# Altium PCB v2.2.0.PcbDoc
Units mm, origin at the board's own origin, x right, y up, seen from the top; angles counter-clockwise.
Board outline 151.5 x 128 mm, 2 copper layers (Top Layer, Bottom Layer); 76 components, 189 nets, 308 pads, 181 vias.
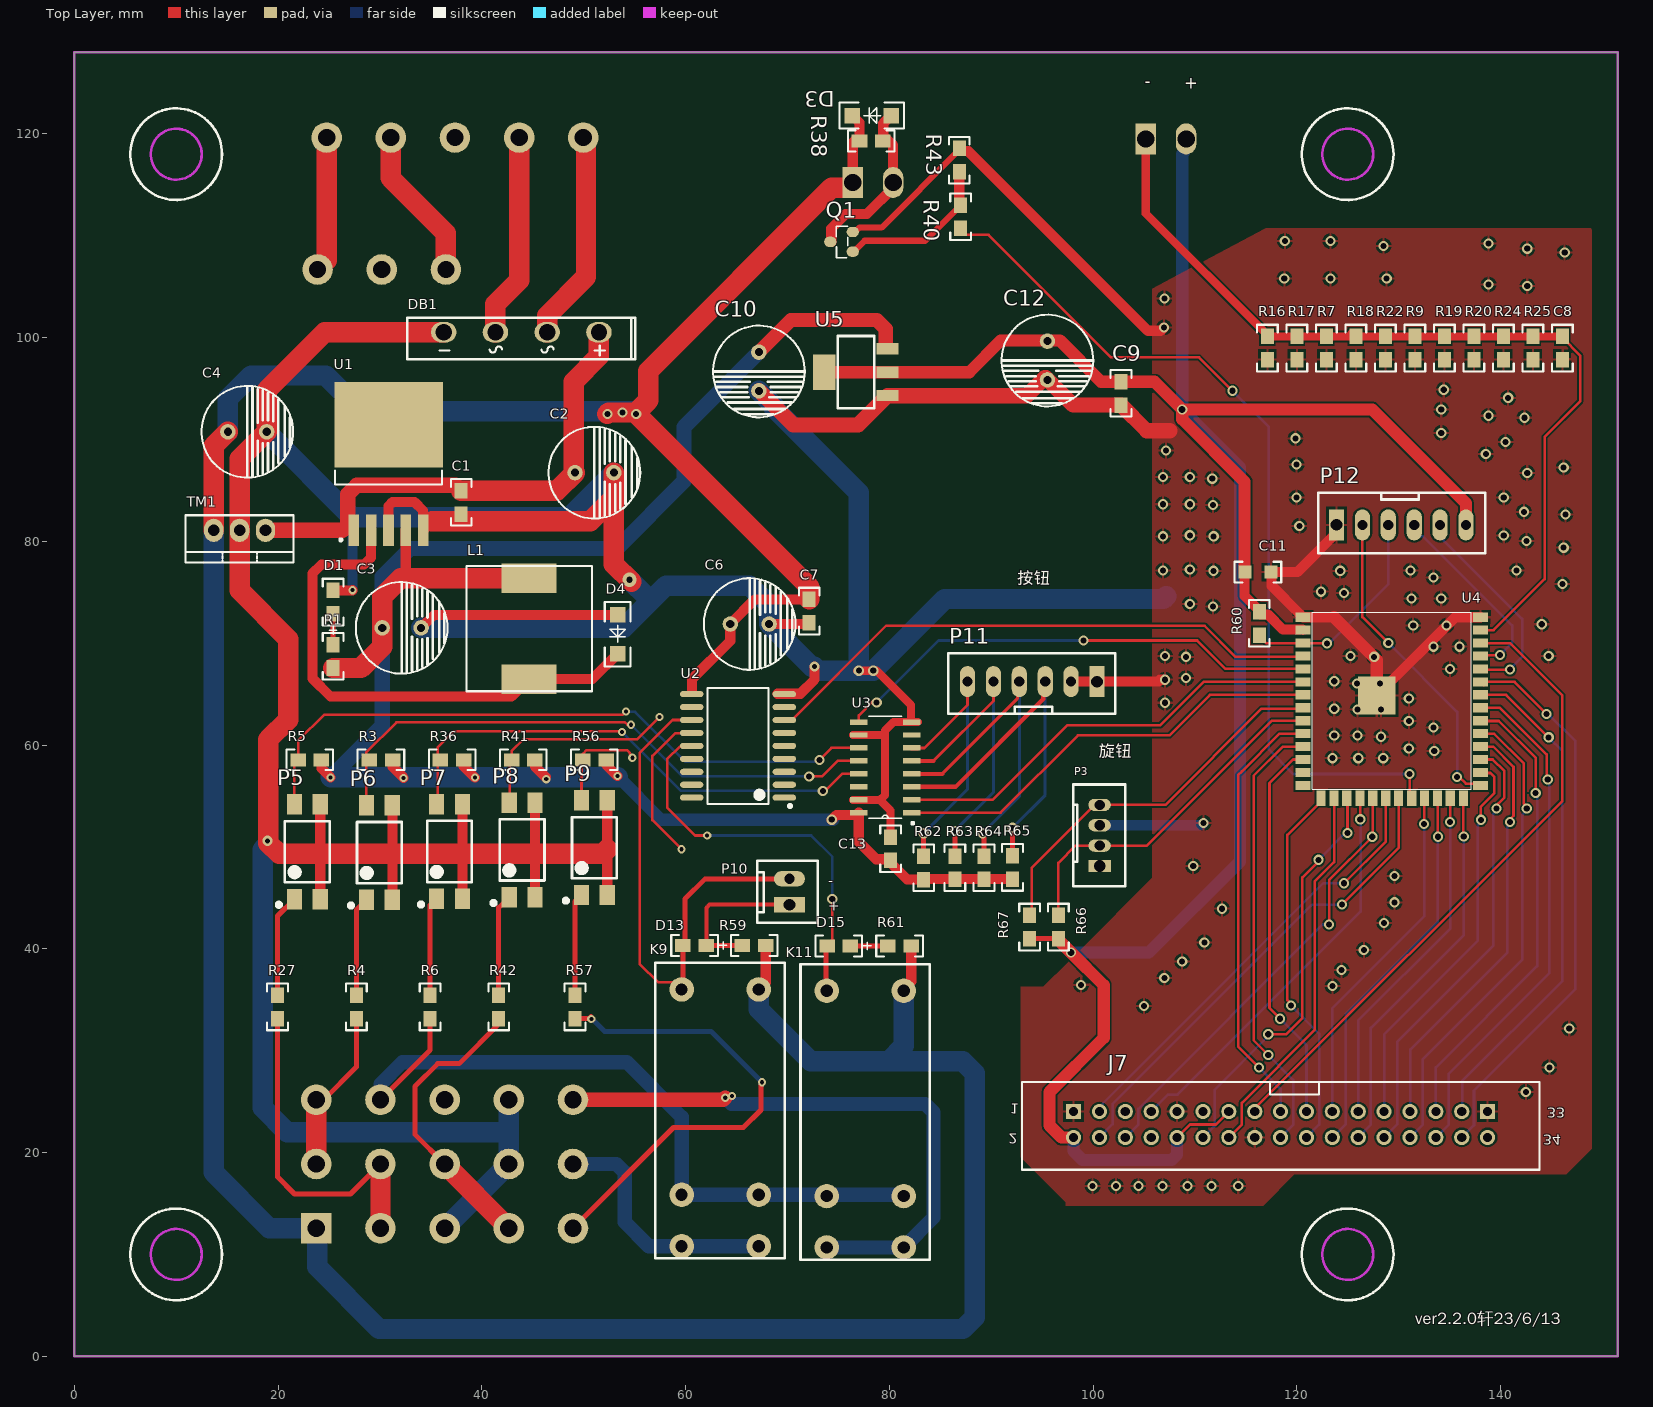
[diagram p0: Top Layer view]
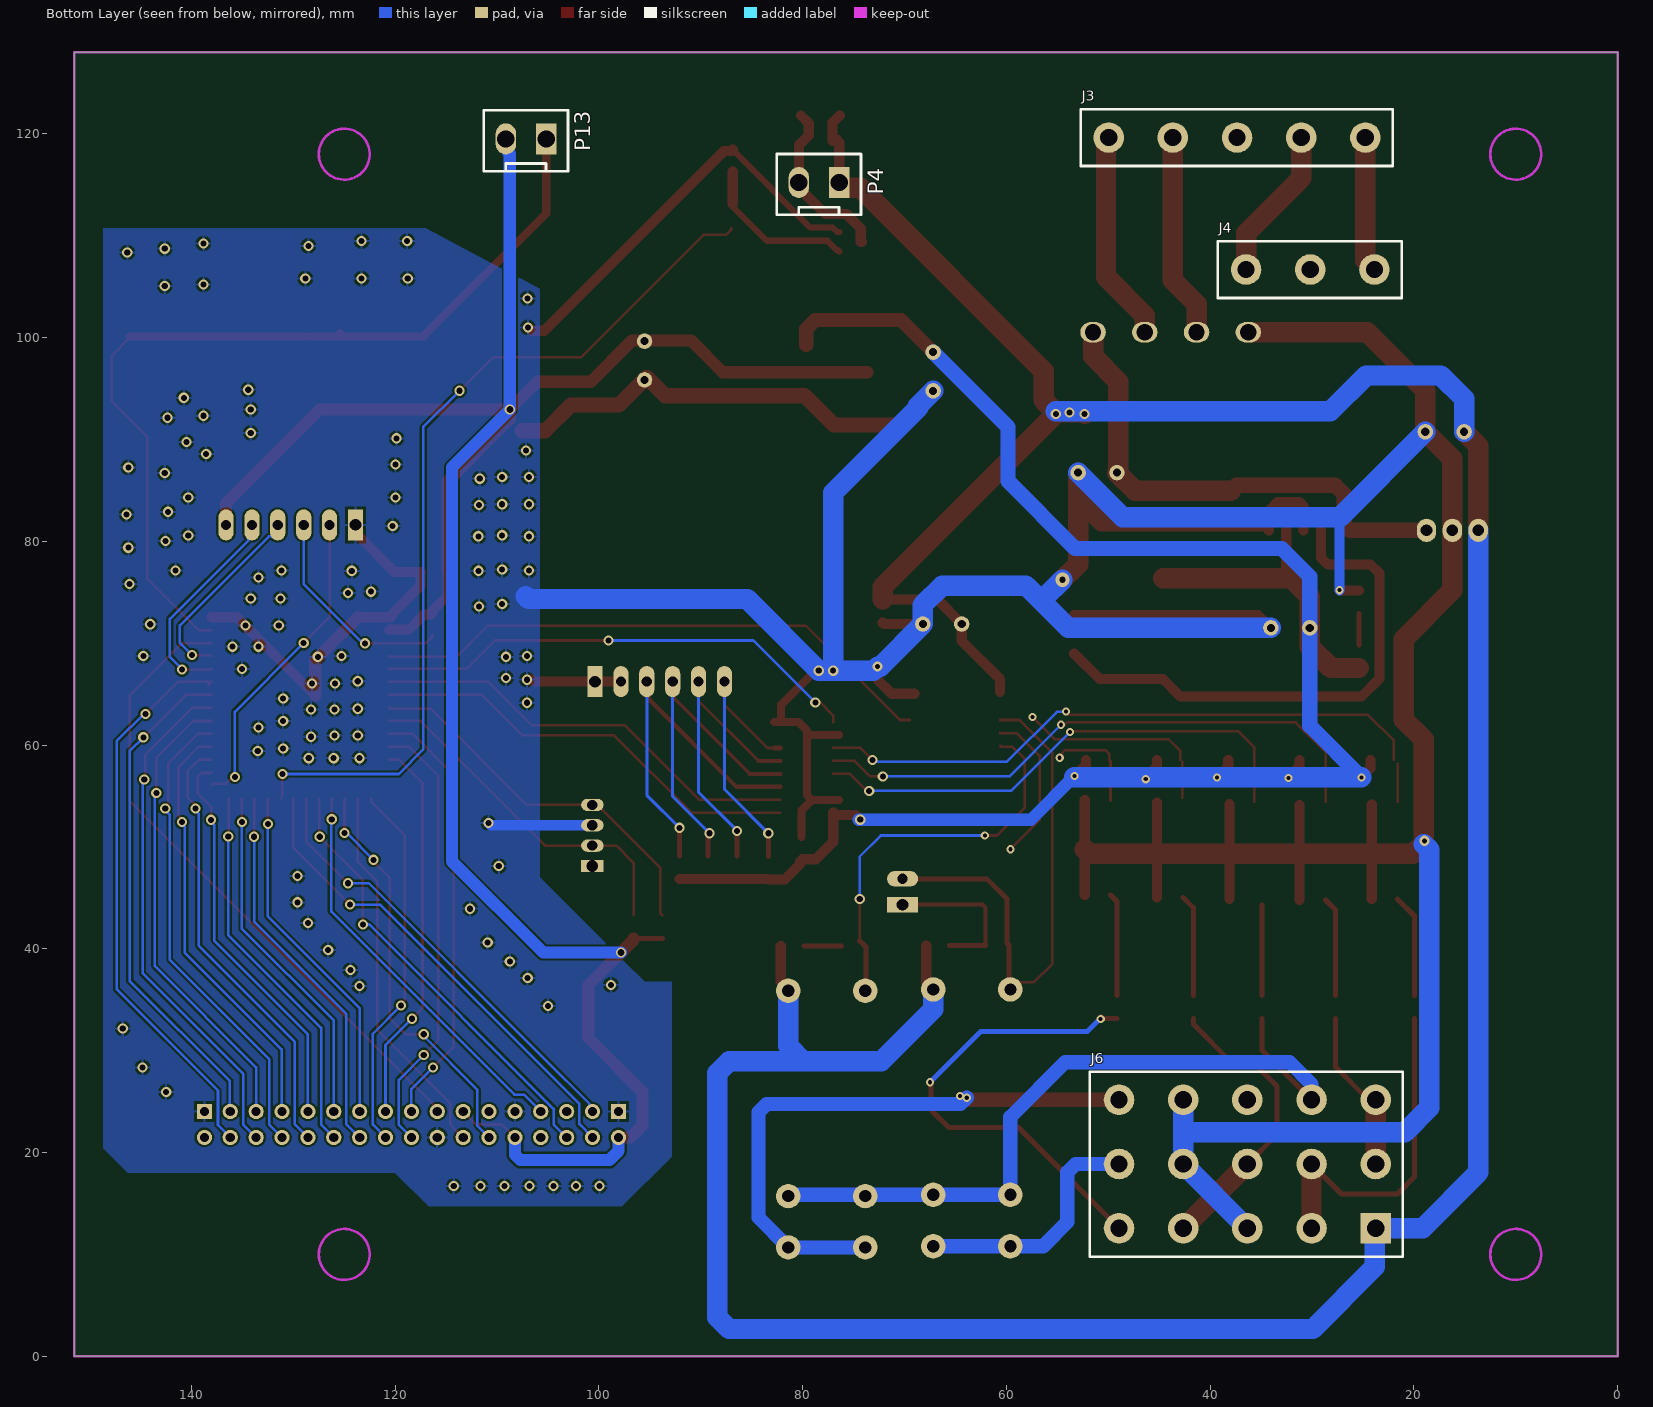
[diagram p1: Bottom Layer view, seen from below]

## Layer stack, top to bottom
Top Solder: solder mask 0.0102, Solder Resist, Dk 3.5
Top Layer: signal copper 0.0356
Dielectric1: dielectric 0.32, FR-4, Dk 4.8
Bottom Layer: signal copper 0.0356
Bottom Solder: solder mask 0.0102, Solder Resist, Dk 3.5

## Board outline
0,0 0,128 151.5,128 151.5,0

## Design rules (kind name [scope] priority, off if disabled: settings)
Clearance [All] p1: gap=0.2 ignorepadtopadclearanceinfootprint=FALSE except(0: Arc-Hole Track-Hole SMDPad-Hole THPad-Hole Via-Hole Fill-Hole Poly-Hole Region-Hole Text-Hole)
ComponentClearance [All] p1 off: gap=0.254 collisioncheckmode=3 verticalgap=0.254 showdistances=FALSE
PlaneConnect [All] p1: planeconnectstyle=Direct reliefexpansion=0.508 reliefentries=4 reliefconductorwidth=0.254 reliefairgap=0.254
PolygonConnect [All] p1: connectstyle=Relief reliefconductorwidth=0.254 reliefentries=4 polygonreliefangle="90 Angle" airgapwidth=0.254
RoutingVias [All] p1: holewidth=0.711 width=1.27 viastyle="Through Hole" minholewidth=0.711 minwidth=1.27 maxholewidth=0.711 maxwidth=1.27
SilkToSolderMaskClearance SilkscreenOverComponentPads [IsPad] p1: minsilkscreentomaskgap=0.254 clearancetoexposedcopper=TRUE
SolderMaskExpansion [All] p1: expansion=0.102 istentingtop=FALSE
Width [All] p1: maxlimit=5 minlimit=0.254 preferedwidth=0.3 minimp=50.000000 maximp=50.000000 favimp=50.000000
27 further rules are at their usual default settings.

## Classes and differential pairs
component class Drive: C1 C2 C3 C4 C6 C7 C8 C9 C10 C12 D1 D3 D4 D13 D15 DB1 J3 J4 J6 K9 K11 L1 P4 P5 P6 P7 P8 P9 Q1 R3 R4 R5 R6 R7 R9 R16 R17 R18 R19 R20 R22 R24 R25 R27 R36 R38 R40 R41 R42 R43 R56 R57 R59 R61 TM1 U1 U5

## Components (designator, comment, footprint, x,y, rotation, side; value= is the part's Value field where it differs from the comment)
C1 "104" 0805#1 37.973,82.677 r90 top
C2 "470UF/50V" CD9 50.8,86.741 r90 top value=470uF
C3 "220uF/50V" CD9 31.877,71.501 r90 top value=470uF
C4 "470UF/50V" CD9 16.725,90.75 r90 top value=470uF
C6 "220uF/50V" CD9 66.04,71.882 r90 top value=470uF
C7 "104" 0805#1 72.136,72.009 r90 top
C8 "103" 0805#1 146.071,97.829 r90 top
C9 "104" 0805#1 102.75,95.66 r270 top
C10 "470UF/50V" CD9 67.2,96.925 r0 top
C11 "104" 0805#2 117.333,76.975 r180 top (schematic designator C3)
C12 "470UF/50V" CD9 95.525,97.999 r0 top
C13 "104" 0805#1 80.125,50.961 r270 top (schematic designator C9)
D1 "04" LED-T 25.527,74.041 r90 top
D3 "IN4148" DO-214AC 77.25,122.175 r90 top
D4 "IN5819" DO-214AC 52.959,69.85 r180 top
D13 "04" LED-T 60.885,40.455 r180 top
D15 "04" LED-T 75.037,40.405 r180 top
DB1 "DB157S" LC-GBU 43.875,100.525 r0 top
J3 "变压器入" 5PIN-6.3 24.765,119.634 r0 bottom
J4 "220V供电" 3PIN-6.3 23.876,106.68 r0 bottom
J6 "3*15JR" 3*5PIN-6.3 23.749,12.573 r0 bottom
J7 "header34" "PCBComponent_1 - duplicate" 145.74,135.435 r180 top locked
K9 "HF115F/024-1HS3" HF115FA 59.615,36.01 r270 top locked
K11 "HF115F/024-1HS3" HF115FA 73.85,35.885 r270 top
L1 "330uH" SMD331 38.481,65.278 r0 top
P3 "Header4" "4PIN 2.0" 95.3,46.125 r90 top
P4 "Header 2" "2PIN 3.96" 80.375,115.225 r0 bottom
P5 "PC817" LC-SMD-4 22.875,49.525 r90 top
P6 "PC817" LC-SMD-4 29.95,49.45 r90 top
P7 "PC817" LC-SMD-4 36.825,49.55 r90 top
P8 "PC817" LC-SMD-4 43.95,49.7 r90 top
P9 "PC817" LC-SMD-4 51.05,49.925 r90 top
P10 "Header 2" "2PIN 2.54" 70.2,45.6 r90 top (schematic designator P2)
P11 "Header 6" PCBComponent_1 141.025,65.631 r180 top
P12 "Comment" PCBComponent_1 83.265,82.21 r0 top
P13 "Header 2" "2PIN 3.96" 109.135,119.5 r0 bottom (schematic designator P4)
Q1 "8050" "SOT-23 - duplicate" 75.25,109.35 r90 top
R1 "2K" 0805#1 25.4,69.85 r270 top
R3 "10k" 0805#1 28.956,58.547 r0 top value=10K
R4 "4.7K" 0805#1 27.686,33.147 r90 top
R5 "10k" 0805#1 21.971,58.547 r0 top value=10K
R6 "4.7K" 0805#1 34.925,33.147 r90 top
R7 "47K" 0805#1 122.906,97.829 r90 top
R9 "47K" 0805#1 131.593,97.829 r90 top
R16 "47K" 0805#1 117.115,97.829 r90 top
R17 "47K" 0805#1 120.011,97.829 r90 top
R18 "47K" 0805#1 125.802,97.829 r90 top
R19 "47K" 0805#1 134.489,97.829 r90 top
R20 "47K" 0805#1 137.384,97.829 r90 top
R22 "47K" 0805#1 128.697,97.829 r90 top
R24 "47K" 0805#1 140.28,97.829 r90 top
R25 "47K" 0805#1 143.175,97.829 r90 top
R27 "4.7K" 0805#1 19.939,33.147 r90 top
R36 "10k" 0805#1 35.941,58.547 r0 top value=10K
R38 "10K" 0805#1 79.361,119.3 r180 top value="RT0603BRD071KL YAGEO"
R40 "470" 0805#1 87,110.714 r90 top value="RT0603BRD071KL YAGEO"
R41 "10k" 0805#1 42.926,58.547 r0 top value=10K
R42 "4.7K" 0805#1 41.656,33.147 r90 top
R43 "10K" 0805#1 86.875,118.561 r270 top value="RT0603BRD071KL YAGEO"
R56 "10k" 0805#1 49.911,58.547 r0 top value=10K
R57 "4.7K" 0805#1 49.149,33.147 r90 top
R59 "10k" 0805#1 65.584,40.328 r0 top value=10K
R60 "10k" 0805#1 116.319,70.801 r90 top value=10K (schematic designator R59)
R61 "10k" 0805#1 79.863,40.278 r0 top value=10K
R62 "10k" 0805#1 83.375,46.8 r90 top value=10K (schematic designator R60)
R63 "10k" 0805#1 86.438,46.814 r90 top value=10K (schematic designator R60)
R64 "10k" 0805#1 89.3,46.814 r90 top value=10K (schematic designator R60)
R65 "10k" 0805#1 92.1,46.842 r90 top value=10K (schematic designator R60)
R66 "330" 0805#1 96.603,40.99 r90 top value=10K (schematic designator R60)
R67 "330" 0805#1 93.775,40.99 r90 top value=10K (schematic designator R60)
TM1 "LM7824CT" TO-220 16.225,81.075 r180 top
U1 "LM2575-5" D2PAK 37.211,89.535 r90 top
U2 "ULN2803" SOP-18_300mil 65.15,59.915 r90 top locked
U3 "SN74HC165D" 74HC165 79.6,57.175 r180 top
U4 "ESP32-S3-WROOM-1U-N8R8" ESP32-S3-WROOM-1U 125.564,67.978 r0 top locked
U5 "AMS1117-3.3_C166063" SOT-223_L6.7-W3.5-P2.30-BR 76.725,96.6 r0 top

## Footprints (in the part's own frame and the unit in brackets; to place one, negate y for a bottom-side part, rotate by r counter-clockwise, add the part's x,y. Pads: shape width x height; smd on the part's side, far side on the other; paste and mask are expansions set on the pad)
"2PIN 2.54" [mm]
  rect 1.5x3.048 hole 1.143: 1(-1.27,0)
  oval 1.5x3.048 hole 1: 2(1.27,0)
  silkscreen extent -3.05,-2.79 3.05,3.18
"2PIN 3.96" [mm]
  rect 2x3.048 hole 1.7: 1(-3.96,0)
  oval 2x3.048 hole 1.7: 2(0,0)
  silkscreen extent -6.1,-2.79 2.16,3.17
3*5PIN-6.3 [mm]
  rect 3x3 hole 1.7: 1(0,0)
  round 3 hole 1.7: 2(6.3,0) 3(12.6,0) 4(18.9,0) 5(25.2,0) 6(0,-6.3) 7(6.3,-6.3) 8(12.6,-6.3) 9(18.9,-6.3) 10(25.2,-6.3) 11(0,-12.6) 12(6.3,-12.6) 13(12.6,-12.6) 14(18.9,-12.6) 15(25.2,-12.6)
  silkscreen extent -2.67,-15.37 28.07,2.79
3PIN-6.3 [mm]
  round 3 hole 1.7: 1(0,0) 2(6.3,0) 3(12.6,0)
  silkscreen extent -2.67,-2.79 15.37,2.79
"4PIN 2.0" [mm]
  rect 1.2x2.2 hole 1.143: 1(2,-5.35)
  oval 1.2x2.2 hole 1: 2(4,-5.35) 3(6,-5.35) 4(8,-5.35)
  silkscreen extent 0,-7.85 10,-2.75
5PIN-6.3 [mm]
  round 3 hole 1.7: 1(0,0) 2(6.3,0) 3(12.6,0) 4(18.9,0) 5(25.2,0)
  silkscreen extent -2.67,-2.79 27.94,2.79
74HC165 [mil]
  rect 67x21 smd: CLK(-102,100) CLKINH(102,100) D0(102,-100) D1(102,-50) D2(102,0) D3(102,50) D4(-102,50) D5(-102,0) D6(-102,-50) D7(-102,-100) GND(-102.05,-199.95) LD(-102,150) QH(101.95,-199.95) "QH\""(-102,-150) SER(102,-150) VCC(102,150)
  silkscreen extent -111,-222 63,195
0805#1 [mil]
  rect 60x50 smd: 1(0,0) 2(90,0)
  silkscreen extent -45,-40 135,40
0805#2 [mil]
  rect 51.18x50 smd: 1(-5,0) 2(95,0)
  silkscreen extent -45,-40 135,40
CD9 [mil]
  round 60 hole 31.5: 1(0,65) 2(0,-85)
  silkscreen extent -177,-187 177,167, body extent -181,-191 181,171, height 50
D2PAK [mm] "LM-2575"
  rect 3.05x1.05 smd: 1(-8.451,9.779) 2(-8.451,8.077) 3(-8.451,6.375) 4(-8.451,4.673) 5(-8.451,2.971)
  rect 8.4x10.65 smd: ""(1.899,6.35)
  silkscreen extent -9.52,1.1 -2.57,11.6, body extent -8.7,1.47 5.7,11.47, height 4.21
DO-214AC [mil]
  rect 60x60 smd: 1(-15,-115) 2(-15,35)
  silkscreen extent -65,-165 35,85
ESP32-S3-WROOM-1U [mm]
  rect 1.5x0.9 smd: 1(-4.953,4.572) 2(-4.953,3.302) 3(-4.953,2.032) 40(12.474,4.572) IO0(12.474,-11.938) IO1(12.474,3.302) IO2(12.474,2.032) IO4(-4.953,0.762) IO5(-4.953,-0.508) IO6(-4.953,-1.778) IO7(-4.953,-3.048) IO8(-4.953,-9.398) IO15(-4.953,-4.318) IO16(-4.953,-5.588) IO17(-4.953,-6.858) IO18(-4.953,-8.128) IO19(-4.953,-10.668) IO20(-4.953,-11.938) IO35(12.474,-10.668) IO36(12.474,-9.398) IO37(12.474,-8.128) IO38(12.474,-6.858) IO39(12.474,-5.588) IO40(12.474,-4.318) IO41(12.474,-3.048) IO42(12.474,-1.778) RXD0(12.474,-0.508) TXD0(12.474,0.762)
  rect 3.7x3.7 smd: GND(2.286,-3.118)
  rect 0.9x1.5 smd: IO3(-3.192,-13.207) IO9(-0.652,-13.207) IO10(0.635,-13.208) IO11(1.888,-13.207) IO12(3.175,-13.208) IO13(4.428,-13.207) IO14(5.715,-13.208) IO21(6.968,-13.207) IO45(10.795,-13.208) IO46(-1.905,-13.208) IO47(8.255,-13.208) IO48(9.508,-13.207)
  silkscreen extent -4.06,-12.32 11.56,5.08
HF115FA [mm]
  round 2.4 hole 1.2: 1(20.16,7.56) 2(25.2,7.56) 3(20.16,0) 4(25.2,0) 5(0,7.56) 6(0,0)
  silkscreen extent -2.6,-2.57 26.4,10.13
LC-GBU [mm]
  oval 2.5x2 hole 1.6: 1(-2.54,0) 2(2.54,0) 3(7.62,0) 4(-7.62,0)
  silkscreen extent -11.2,-2.67 11.2,1.4
LC-SMD-4 [mm]
  rect 2x1.5 smd: 1(-4.65,1.27) 2(-4.65,-1.27) 3(4.65,-1.27) 4(4.65,1.27)
  silkscreen extent -5.4,-2.2 3,3, body extent -5.02,-2.42 5.01,2.42, height 3.9
LED-T [mil]
  rect 60x50 smd: 1(-45,5) 2(45,5)
  silkscreen extent -125,-35 90,45, body extent -34,-20 44,30, height 28
PCBComponent_1 [mm]
  rect 1.5x3.048 hole 1.143: 1(40.64,-0.6)
  oval 1.5x3.048 hole 1: 2(43.18,-0.6) 3(45.72,-0.6) 4(48.26,-0.6) 5(50.8,-0.6) 6(53.34,-0.6)
  silkscreen extent 38.86,-3.39 55.24,2.57
"PCBComponent_1 - duplicate" [mm]
  round 1.5 hole 0.9: 3V3(37.49,113.95) 3V3(47.65,113.95) CS(29.87,113.95) D0(9.55,113.95) D1(9.55,111.41) D2(12.09,113.95) D3(12.09,111.41) D4(14.63,113.95) D5(14.63,111.41) D6(17.17,113.95) D7(17.17,111.41) D8(19.71,113.95) D9(19.71,111.41) D10(22.25,113.95) D11(22.25,111.41) D12(24.79,113.95) D13(24.79,111.41) D14(27.33,113.95) D15(27.33,111.41) INT(40.03,111.41) NC(7.01,113.95) NC(34.95,111.41) NC(40.03,113.95) PS(37.49,111.41) RD(32.41,111.41) RS(29.87,111.41) RST(34.95,113.95) SCL(45.11,111.41) SDA(45.11,113.95) T_IN(42.57,111.41) WAT(42.57,113.95) WR(32.41,113.95)
  rect 1.5x1.5 hole 0.9: GND(7.01,111.41) GND(47.65,111.41)
  silkscreen extent 1.93,108.49 52.73,117.13
SMD331 [mm]
  rect 5.4x2.9 smd: 1(6.15,1.2) 2(6.15,11.1)
  silkscreen extent 0,0 12.32,12.32
SOP-18_300mil [mm]
  oval 0.6x2.3 smd: 1(-5.08,-4.55) 2(-3.81,-4.55) 3(-2.54,-4.55) 4(-1.27,-4.55) 5(0,-4.55) 6(1.27,-4.55) 7(2.54,-4.55) 8(3.81,-4.55) 9(5.08,-4.55) 10(5.08,4.55) 11(3.81,4.55) 12(2.54,4.55) 13(1.27,4.55) 14(0,4.55) 15(-1.27,4.55) 16(-2.54,4.55) 17(-3.81,4.55) 18(-5.08,4.55)
  silkscreen extent -6.05,-5.25 5.7,3
"SOT-23 - duplicate" [mil]
  oval 40x47.24 smd: B(-35.98,-45.98) C(2.01,40.98) E(40,-45.98)
  silkscreen extent -59,-26 62,18
SOT-223_L6.7-W3.5-P2.30-BR [mm]
  rect 2.2x1.1 smd: 1(3.099,-2.3) 2(3.099,0) 3(3.099,2.3)
  rect 2.2x3.5 smd: 4(-3.099,0)
  silkscreen extent -1.8,-3.55 1.8,3.55
TO-220 [mil]
  oval 75x90 hole 45: 1(-100,0) 2(0,0) 3(100,0)
  silkscreen extent -208,-58 208,125

## Part data
C1 C7 C8 C11: library part Cap, "Capacitor", LatestRevisionDate=17-Jul-2002, LatestRevisionNote="Re-released for DXP Platform.", PackageReference=RAD-0.3, Published=8-Jun-2000, Publisher="Altium Limited"
C2 C3 C4 C6: library part "Cap Pol1", "Polarized Capacitor (Radial)", LatestRevisionDate=17-Jul-2002, LatestRevisionNote="Re-released for DXP Platform.", PackageReference=RB7.6-15, Published=8-Jun-2000, Publisher="Altium Limited"
C9 C13: library part CAP
C10 C12: library part ECAP
D1 D13 D15: library part LED0, "Typical INFRARED GaAs LED", LatestRevisionDate=08-Jul-2005, LatestRevisionNote="Mech Layer 1 removed.", PackageDescription="LED; 2 Leads", PackageReference=LED-0, Published=8-Jun-2000, Publisher="Altium Limited"
D3 D4: library part "D Zener", "Zener Diode", LatestRevisionDate=17-Jul-2002, LatestRevisionNote="Re-released for DXP Platform.", PackageReference=DIODE-0.7, Published=8-Jun-2000, Publisher="Altium Limited"
DB1: library part BRIDGE2
J3: library part CON5, "Connector"
J4: library part CON3, "Connector"
J6: library part Component_1
J7: "Header, 34-Pin2.54MM"
K9 K11: library part RELAY-DPST
L1: library part Inductor, "Inductor", Code_IEC=1005, Code_JEITA=0402, LatestRevisionDate=29-May-2009, LatestRevisionNote="IPC-7351 Footprint Added.", PackageDescription="Chip Inductor", PackageReference=0402-A, Published=8-Jun-2000, Publisher="Altium Limited"
P3: "Header, 4-Pin2MM"
P4 P10 P13: "Header, 2-Pin", LatestRevisionDate=17-Jul-2002, LatestRevisionNote="Re-released for DXP Platform.", Publisher="Altium Limited"
P5 P6 P7 P8 P9: library part P521
Q1: library part BC817-8050
R1 R3 R4 R5 R6 R7 R9 R16 R17 R18 R19 R20 R22 R24 R25 R27 R36 R38 R40 R41 R42 R43 R56 R57 R59 R60 R61 R62 R63 R64 R65 R66 R67: library part Res2, "Resistor", LatestRevisionDate=17-Jul-2002, LatestRevisionNote="Re-released for DXP Platform.", PackageReference=AXIAL-0.4, Published=8-Jun-2000, Publisher="Altium Limited"
U1: library part LM2575
U4: "ESP32-S3-WROOM-1U-N16R8"
U5: library part AMS1117-1.5_C166063, BOM_LCSC Assembly=Yes, BOM_Manufacturer=SK, BOM_Manufacturer Part=AMS1117-1.5, BOM_Supplier=LCSC, BOM_Supplier Part=C166063, Contributor=LCSC, SMT Type=Extend, spicePre=U

## Via types
v1: diameter 1, hole 0.6, Top Layer to Bottom Layer, 159 vias
v2: diameter 0.8, hole 0.4, Top Layer to Bottom Layer, tented both sides, 17 vias
v3: diameter 1, hole 0.7, Top Layer to Bottom Layer, 2 vias
v4: diameter 1, hole 0.5, Top Layer to Bottom Layer, tented both sides, 2 vias
v5: diameter 1.4, hole 0.6, Top Layer to Bottom Layer, tented both sides, 1 vias

## Nets (pads, with @x,y where several pads share a name; then routed paths per layer and width w, separated by ;. In a path a pad name is that pad's centre, name@x,y a point inside that pad or via, vN(x,y) a via of type N, cw(c..) or ccw(c..) an arc to the next point about the centre after c; other vN are vias at no path point)
165_CLK: U3.CLK U4.IO6 | length 43.2
  Top Layer w0.254: U3.CLK 90.16,54.635 93.14,57.615 97.475,61.95 106.606,61.95 110.856,66.2 U4.IO6
165_LD: U3.LD U4.IO7 | length 43.2
  Top Layer w0.254: U3.LD 90.923,53.365 98.501,60.943 107.493,60.943 111.48,64.93 U4.IO7
165_QH: U3.QH U4.IO5 | length 48.6
  Top Layer w0.254: U3.QH 77.011,62.911 78.42,64.32 78.549,64.19 v1(78.76,64.19) ; v1(99.075,70.26) 110.215,70.26 113.005,67.47 U4.IO5
  Bottom Layer w0.254: v1(78.76,64.19) 84.83,70.26 v1(99.075,70.26)
485-EN: 
485-RXD: 
485-TXD: 
+3.3V: C9.1 C11.2 C12.1 J7.3V3 J7.RD P12.6 P13.2 R60.2 R66.1 R67.1 U4.2 U5.2 U5.4 | length 242.6
  Top Layer w0.254: J7.3V3@108.25,21.485 109.52,22.755 112.06,22.755 J7.RD J7.RD@113.33,24.14
  Top Layer w0.5: R67.1 R66.1
  Top Layer w1: C11.2@114.875,76.975 114.875,74.658 116.184,73.349 116.319,73.214 R60.2 ; R60.2@116.416,73.087 116.454,73.049 116.454,72.825 117.148,72.825 118.643,71.33 120.561,71.33 U4.2
  Top Layer w1.2: U5.4 U5.2 87.85,96.6 90.95,99.7 C12.1@95.469,99.7 ; C12.1@95.525,99.7 96.75,99.7 100.79,95.66 C9.1 106.025,95.66 v3(108.75,92.935) ; R66.1 96.603,40.863 v3(97.842,39.623) 101.05,36.416 101.05,31.26 95.725,25.935 95.725,22.66 96.9,21.485 J7.3V3@98.09,21.485 ; C11.2@114.875,76.975 114.875,85.85 108.75,91.975 v3(108.75,92.935) ; P12.6 136.605,83.73 127.4,92.935 v3(108.75,92.935)
  Bottom Layer w1.2: v3(97.842,39.623) 105.473,39.623 114.425,48.575 114.425,87.26 v3(108.75,92.935) 108.75,118.025 108.982,118.257 108.982,119.347 P13.2 ; J7.3V3@98.09,21.485 98.09,20.139 98.969,19.26 107.725,19.26 108.25,19.785 ; 108.25,20.035 J7.3V3@108.25,21.485
AC24L: DB1.1 J3.4 | length 20.1
  Top Layer w2: DB1.1 41.335,103.285 43.665,105.615 J3.4
AC24N: DB1.2 J3.5 | length 20.8
  Top Layer w2: DB1.2 46.415,102.14 50.225,105.95 50.225,119.374 J3.5
AC230_L: J3.1 J4.1 | length 13.3
  Top Layer w2: J4.1 24.765,107.569 J3.1
AC230_N: J3.2 J4.3 | length 15.2
  Top Layer w2: J3.2 31.065,115.66 36.476,110.249 J4.3
ACOUTA: 
ACOUTB: 
ADC_NTC: 
ADC_ON: 
AREF: 
ASW_1: 
ASW_2: 
AVCC: 
BOOT: P12.2 U4.IO0 | length 31.2
  Top Layer w0.254: P12.2 126.445,72.55 v1(128.985,70.01) ; v1(135.738,56.875) 135.937,56.875 136.602,56.21 137.868,56.21 U4.IO0
  Bottom Layer w0.254: v1(128.985,70.01) 135.738,63.257 v1(135.738,56.875)
BU1: P11.6 R62.2 U3.D7 | length 28.5
  Top Layer w0.3: U3.D7@82.775,59.715 83.46,59.715 87.685,63.94 P11.6
  Top Layer w0.5: U3.D7 U3.D7@82.775,59.715 ; R62.2 v1(83.375,51.339)
  Bottom Layer w0.3: v1(83.375,51.339) 87.685,55.649 P11.6
BU2: P11.5 R63.2 U3.D6 | length 30.8
  Top Layer w0.3: 84.345,58.445 90.225,64.325 P11.5
  Top Layer w0.4: U3.D6 84.345,58.445
  Top Layer w0.5: R63.2 v1@86.438,51.339
  Bottom Layer w0.3: v1(86.438,51.575) 90.225,55.362 P11.5
BU3: P11.4 R64.2 U3.D5 | length 33.9
  Top Layer w0.3: 85.2,57.175 92.575,64.55 92.575,66.041 P11.4
  Top Layer w0.4: U3.D5 85.2,57.175
  Top Layer w0.5: v1(89.149,51.339) 89.3,51.188 R64.2
  Bottom Layer w0.3: v1(89.149,51.339) 92.765,54.955 P11.4
BU4: P11.3 R65.2 U3.D4 | length 36.4
  Top Layer w0.4: U3.D4 86.48,55.905 95.114,64.539 95.114,66.04 P11.3
  Top Layer w0.5: R65.2 v1@92.1,51.575
  Bottom Layer w0.3: v1(92.1,51.875) 95.305,55.08 P11.3
BZ1: R40.1 U4.IO14 | length 87.3
  Top Layer w0.254: R40.1 87,110.587 87.508,110.079 89.751,110.079 101.78,98.05 110.4,98.05 v1(113.675,94.775) ; v1(131.075,57.16) 131.075,54.974 U4.IO14
  Bottom Layer w0.254: v1(113.675,94.775) 117.25,91.2 117.25,59.56 119.65,57.16 v1(131.075,57.16)
D0: J7.D0 U4.IO42 | length 56
  Top Layer w0.254: J7.D0 J7.D0@136.19,21.822 ; U4.IO42@138.361,65.877 U4.IO42 141.385,66.2 v1(144.525,63.06)
  Bottom Layer w0.254: J7.D0 137.4,22.695 137.4,26.085 147.35,36.035 147.35,60.385 144.675,63.06 v1(144.525,63.06)
D1: J7.D1 U4.IO41 | length 49.8
  Top Layer w0.254: U4.IO41 140.555,64.93 v1(144.725,60.76)
  Bottom Layer w0.254: J7.D1 136.225,24.06 136.225,27.01 146.071,36.856 146.071,59.414 v1(144.725,60.76)
D2: J7.D2 U4.IO40 | length 50.7
  Top Layer w0.254: U4.IO40 139.936,63.66 144.525,59.071 144.525,56.735 v1(144.638,56.622)
  Bottom Layer w0.254: J7.D2 134.925,22.76 134.925,27.735 144.8,37.61 144.8,56.101 144.78,56.12 144.78,56.48 v1(144.638,56.622)
D3: J7.D3 U4.IO39 | length 45.8
  Top Layer w0.254: U4.IO39 138.068,62.36 139.825,62.36 143.475,58.71 143.475,55.31 v1(143.45,55.285)
  Bottom Layer w0.254: J7.D3 133.65,28.36 143.593,38.303 143.593,55.142 v1(143.45,55.285)
D4: J7.D4 U4.IO38 | length 47
  Top Layer w0.254: U4.IO38 138.048,61.11 139.375,61.11 142.3,58.185 142.3,54.237 142.575,53.962 v1(142.575,53.76)
  Bottom Layer w0.254: J7.D4 132.375,22.75 132.375,29.16 142.15,38.935 142.15,53.163 142.575,53.588 v1(142.575,53.76)
D5: J7.D5 U4.IO37 | length 42.3
  Top Layer w0.254: U4.IO37 139.285,59.85 141.275,57.86 141.275,53.06 v1@140.578,52.363
  Bottom Layer w0.254: J7.D5 131.15,24.065 131.15,30.11 140.65,39.61 140.65,51.958 140.925,52.233 v1(140.925,52.435)
D6: J7.D6 U4.IO36 | length 43.9
  Top Layer w0.254: J7.D6 J7.D6@128.57,21.78 ; U4.IO36 139.23,58.58 140.375,57.435 140.375,54.86 139.743,54.228 139.743,53.903 v1(139.6,53.76)
  Bottom Layer w0.254: J7.D6 129.875,22.79 129.875,30.885 139.275,40.285 139.275,53.233 139.6,53.558 v1(139.6,53.76)
D7: J7.D7 U4.IO35 | length 39
  Top Layer w0.254: J7.D7 J7.D7@128.625,24.08 ; U4.IO35 138.093,57.255 139.02,57.255 139.4,56.875 139.4,55.285 138.075,53.96 v1(138.075,52.66)
  Bottom Layer w0.254: J7.D7 128.57,31.61 137.775,40.815 137.775,52.158 138.075,52.458 v1(138.075,52.66)
D8: J7.D8 U4.IO45 | length 37.8
  Top Layer w0.254: J7.D8 J7.D8@126.2,21.485 ; U4.IO45 136.359,51.051 v1(136.392,51.018) v1@136.425,50.985
  Bottom Layer w0.254: J7.D8 127.275,22.73 127.275,32.235 136.392,41.352 v1(136.392,51.018)
D9: J7.D9 U4.IO48 | length 34.6
  Top Layer w0.254: J7.D9 J7.D9@126.106,24.101 ; v1@135.025,52.435 v1(135.049,52.459) 135.072,52.482 U4.IO48
  Bottom Layer w0.254: J7.D9 126.03,32.94 135.049,41.958 v1(135.049,52.459)
D10: J7.D10 U4.IO47 | length 37.6
  Top Layer w0.254: J7.D10 J7.D10@123.55,21.485 ; U4.IO47 133.819,51.03 v1(133.85,50.999)
  Bottom Layer w0.254: J7.D10 124.825,22.82 124.825,33.635 133.85,42.66 v1(133.85,50.999)
D11: J7.D11 U4.IO21 | length 34.5
  Top Layer w0.254: v1(132.5,52.26) 132.5,54.739 U4.IO21
  Bottom Layer w0.254: J7.D11 123.49,34.169 132.5,43.179 v1(132.5,52.26)
D12: J7.D12 U4.IO3 | length 36.5
  Top Layer w0.254: v1(119.425,34.435) 119.425,34.607 119.075,34.957 119.075,51.174 122.372,54.471 U4.IO3 ; J7.D12 J7.D12@121,21.485
  Bottom Layer w0.254: v1(119.425,34.435) 122.2,31.66 122.2,22.735 J7.D12
D13: J7.D13 U4.IO8 | length 38
  Top Layer w0.254: v1(118.35,33.135) 118.35,33.16 117.325,34.185 117.325,56.26 119.645,58.58 U4.IO8
  Bottom Layer w0.254: v1(118.35,33.135) 120.95,30.535 J7.D13
D14: J7.D14 U4.IO18 | length 43.8
  Top Layer w0.254: v1(117.2,29.585) 115.775,31.01 115.775,57 118.625,59.85 U4.IO18 ; J7.D14 J7.D14@118.55,21.485
  Bottom Layer w0.254: v1(117.2,29.585) 119.65,27.135 119.65,22.725 J7.D14
D15: J7.D15 U4.IO17 | length 42.8
  Top Layer w0.254: v1(116.3,28.36) 114.25,30.41 114.25,57.06 114.6,57.41 118.31,61.12 U4.IO17
  Bottom Layer w0.254: v1(116.3,28.36) 118.41,26.25 J7.D15
DATA_INA: 
DATA_INB: 
DATA_OUT: 
DC: J7.RS U4.IO2 | length 63.5
  Top Layer w0.254: J7.RS 115.87,24.305 146.071,54.506 146.071,64.864 140.925,70.01 U4.IO2
DC24V: C4.1 C6.1 C7.2 D3.2 J6.1 K9.5 K11.5 P4.1 R38.2 R59.2 R61.2 TM1.3 U2.10 | length 354.2
  Top Layer w1: U2.10@60.62,65.195 60.62,66.445 64.389,70.214 C6.1 66.802,74.295 C7.2 ; K9.5 67.87,36.705 R59.2 ; D3.2 77.075,121.08 R38.2 ; P4.1 76.415,119.151 R38.2@76.82,119.555 ; K11.5@81.327,35.96 82.149,36.782 R61.2
  Top Layer w2: TM1.3 13.685,89.361 C4.1 ; v1(52.325,92.5) 52.475,92.65 v1(53.814,92.65) 55.153,92.65 56.325,93.822 56.325,96.7 74.326,114.701 76.415,114.701 P4.1 ; v1(55.153,92.5) 72.136,75.517 C7.2
  Bottom Layer w2: TM1.3 13.685,18.04 19.152,12.573 J6.1 23.85,12.472 23.85,8.775 29.95,2.675 87.203,2.675 88.375,3.847 88.375,27.803 87.203,28.975 79.925,28.975 ; C4.1 15.074,93.999 17.35,96.275 24.7,96.275 28.225,92.75 v1@55.153,92.75 ; K9.5 67.175,34.075 72.275,28.975 79.925,28.975 ; K11.5 81.41,30.46 79.925,28.975
E+3.3V: 
EN: P12.3 R60.1 U4.3 | length 21.2
  Top Layer w0.254: R60.1 116.319,70.674 116.983,70.01 U4.3 120.636,69.985 v1(122.975,69.985)
  Bottom Layer w0.254: v1@123.075,69.885 128.985,75.795 P12.3
EP_CLK: 
EP_DIO: 
EP_STB: 
EVCC: 
GND: C1.1 C2.2 C3.2 C4.2 C6.2 C7.1 C8.1 C9.2 C10.2 C11.1 C12.2 C13.1 D1.2 D4.1 DB1.4 J6.3 J6.9 J6.14 J7.CS J7.GND J7.PS P3.3 P5.2 P5.3 P6.2 P6.3 P7.2 P7.3 P8.2 P8.3 P9.2 P9.3 P11.1 P11.2 P12.1 Q1.E R7.1 R9.1 R16.1 R17.1 R18.1 R19.1 R20.1 R22.1 R24.1 R25.1 R43.1 TM1.2 U1.3 U1.5 U2.9 U3.CLKINH U3.GND U3.SER U4.1 U4.40 U4.GND U5.1 | length 624.5
  Top Layer w0.254: J7.CS J7.CS@115.87,21.615
  Top Layer w0.6: Q1.E 76.623,110.366 77.057,110.8 79.241,110.8 86.875,118.434 R43.1
  Top Layer w0.8: U3.CLKINH@76.425,54.6 79.106,54.6 ; U3.SER@76.425,60.985 U3.SER 79.575,60.985 ; v1@76.85,67.3 v1(77.011,67.3) v1(78.42,67.3) 78.75,67.3 82.125,63.925 82.125,62.321 U3.GND U3.GND@82.8,62.254 ; C13.1 80.125,53.581 79.106,54.6 ; U3.GND@81.875,62.254 80.404,62.254 79.575,61.425 79.575,60.985 ; 79.106,54.6 79.575,55.069 79.575,60.985
  Top Layer w1: P5.2 24.145,49.325 P5.3 ; D1.2 27.284,75.184 v2(27.3,75.2) ; U1.3 30.836,83.461 31.225,83.85 33.4,83.85 34.225,83.025 34.225,81.099 U1.5 35.128,81.972 ; P6.2 31.22,49.325 P6.3 ; C3.2 35.306,72.771 D4.1 ; P7.2 38.095,49.325 P7.3 ; P8.2 45.22,49.325 P8.3 ; P9.2 52.32,49.775 P9.3 ; C6.2 72.009,71.882 C7.1 ; U2.9@69.025,65.031 71.259,65.031 72.651,66.423 v4(72.651,67.7) ; R43.1@86.875,118.434 87.01,118.299 87.751,118.299 105.387,100.663 106.638,100.663 v1(106.975,101) ; P11.2 P11.1 106.413,66.231 106.598,66.415 v1(107.072,66.415) ; U4.1@120.361,72.6 120.361,72.8 117.526,75.635 117.526,76.909 C11.1 120.044,76.975 123.905,80.836 P12.1 ; U4.1 123.659,72.55 ; U4.GND 135.54,72.55 U4.40
  Top Layer w1.2: 123.659,72.55 127.85,68.359 U4.GND
  Top Layer w1.5: C10.2 67.205,94.761 67.24,94.761 70.577,91.425 76.949,91.425 U5.1 93.5,94.3 95.25,96.05 95.377,96.05 98.053,93.374 C9.2 105.27,90.854 107.534,90.854
  Top Layer w2: 35.128,81.972 50.647,81.972 52.5,83.825 ; DB1.4 24.6,100.525 18.884,94.809 C4.2 16.225,88.091 TM1.2 16.225,75.175 21,70.4 21,62.5 19.05,60.55 19.05,50.375 20.1,49.325 24.145,49.325 31.22,49.325 38.095,49.325 45.22,49.325 51.87,49.325 52.32,49.775 ; C2.2 52.959,77.766 v5@54.7,76.025
  Bottom Layer w1: 27.259,82.375 27.3,82.334 v2(27.3,75.2) ; P3.3 110.625,52.125 v1(110.856,52.357)
  Bottom Layer w2: C4.2 27.259,82.375 48.593,82.375 C2.2 ; v4@19.025,50.275 18.5,49.75 18.5,24.375 20.875,22 42.649,22 ; C3.2 53.926,71.501 56.325,73.9 ; J6.3 J6.9 42.649,22 ; J6.14 42.649,22 ; v5(54.5,76.225) 56.325,74.4 56.325,73.9 ; C10.2 68.7,93.266 ; 68.613,93.179 77.011,84.782 v1(77.011,67.3) ; 107.177,74.591 106.921,74.335 85.454,74.335 v1(78.42,67.3) v1(77.011,67.3) ; 56.325,73.9 58.075,75.65 66.3,75.65 68.199,73.751 C6.2 72.381,67.7 v4(72.651,67.7) 73.051,67.3 v1(77.011,67.3)
  other v1: 99.952,16.71 102.244,16.71 104.45,16.71 106.825,16.71 109.288,16.71 111.617,16.71 114.256,16.71 142.483,25.947 144.8,28.36 146.75,32.175 105,34.385 123.508,36.333 98.825,36.46 106.997,37.145 124.4,37.91 108.75,38.76 126.583,39.885 110.925,40.629 128.57,42.532 112.65,43.935 129.6,44.56 129.6,47.141 109.832,48.125 123.508,58.71 126.042,58.71 128.486,58.71 133.497,59.414 131,59.65 128.279,60.815 123.681,60.943 125.966,60.943 133.425,61.71 131,62.354 125.966,63.492 128.279,63.492 123.681,63.559 107.072,64.151 131,64.56 125.9,66.035 128.155,66.035 123.681,66.26 109.135,66.573 135.032,67.46 109.135,68.66 127.596,68.66 107.072,68.74 125.261,68.74 144.725,68.74 133.425,69.657 135.974,69.657 131.428,71.735 134.695,71.735 144.043,71.862 111.775,73.6 109.5,73.847 131.258,74.385 134.179,74.385 124.622,74.932 122.372,75.054 146.071,75.798 133.425,76.457 111.831,77.102 124.262,77.102 106.875,77.135 131.175,77.135 141.583,77.135 109.5,77.229 146.198,79.376 142.55,80.035 106.875,80.49 111.84,80.49 140.314,80.573 109.5,80.588 120.25,81.51 146.379,82.632 142.3,82.893 111.775,83.566 106.875,83.642 109.5,83.642 119.975,84.301 140.314,84.301 111.699,86.15 106.875,86.325 109.5,86.325 142.625,86.71 146.198,87.248 119.975,87.529 138.557,88.56 107.177,88.91 140.5,89.76 119.875,90.11 134.179,90.638 142.34,92.128 138.825,92.325 134.179,92.935 140.75,94.085 134.426,94.882 107,103.85 142.625,105.053 138.825,105.21 118.775,105.785 123.3,105.785 128.825,105.785 146.3,108.35 142.625,108.725 128.525,109 138.825,109.235 118.825,109.475 123.3,109.475
  other v4: 18.95,50.6
IN1A: 
IN1B: 
IN2A: 
IN2B: 
INT: J7.INT U4.IO10 | length 39.8
  Top Layer w0.254: U4.IO10 126.225,54.744 v1(126.225,52.71)
  Bottom Layer w0.254: J7.INT 107.37,25.685 108.3,25.685 126.275,43.66 126.275,52.66 v1(126.225,52.71)
L_TER: C8.2 P13.1 R7.2 R9.2 R16.2 R17.2 R18.2 R19.2 R20.2 R22.2 R24.2 R25.2 U4.IO1 | length 87.9
  Top Layer w0.254: U4.IO1 139.32,71.28 144.325,76.285 144.325,90.235 147.825,93.735 147.825,98.234 146.071,99.988 C8.2 ; 138.5,100.265 138.65,100.115
  Top Layer w0.8: P13.1 105.175,112.182 117.115,100.242 R16.2 R17.2 R7.2 125.091,100.115 ; R18.2@125.394,100.419 125.091,100.115 ; R22.2@128.335,100.115 R18.2 125.091,100.115 ; R22.2 R9.2 133.041,100.115 R19.2 R20.2 138.65,100.115 R24.2 R25.2 C8.2
LIN_B1: P5.4 R5.1 U3.D0 | length 64.5
  Top Layer w0.254: P5.4@21.59,54.434 R5.1@21.59,58.166 ; R5.1 21.971,60.427 24.536,62.992 53.842,62.992 v2(54.15,63.3) ; v1(73.152,58.547) 74.32,59.715 U3.D0
  Bottom Layer w0.254: v2(54.15,63.3) 54.186,63.264 55.061,63.264 59.98,58.345 72.63,58.345 72.689,58.404 73.009,58.404 v1(73.152,58.547)
LIN_B2: P6.4 R3.1 U3.D1 | length 57.2
  Top Layer w0.254: P6.4@28.639,54.434 28.639,58.547 28.639,59.245 31.623,62.23 54.044,62.23 54.282,61.992 v2(54.649,61.992) ; v1(72.136,56.925) 73.415,56.925 74.935,58.445 U3.D1
  Bottom Layer w0.254: v2(54.649,61.992) 59.716,56.925 v1(72.136,56.925)
LIN_B3: P7.4 R36.1 U3.D2 | length 50.5
  Top Layer w0.254: P7.4@35.687,54.434 35.687,58.547 35.687,59.792 37.262,61.366 53.675,61.366 v2(53.761,61.281) ; v1(73.475,55.5) 73.677,55.5 73.933,55.756 73.956,55.756 75.375,57.175 U3.D2
  Bottom Layer w0.254: v2(53.761,61.281) 59.541,55.5 v1(73.475,55.5)
LIN_B4: P8.4 R41.1 | length 20.3
  Top Layer w0.254: P8.4@42.735,54.815 R41.1@42.735,58.356 ; R41.1 42.926,59.411 44.069,60.554 55.254,60.554 v2(57.45,62.75)
LIN_B5: P9.4 R56.1 | length 10.1
  Top Layer w0.254: P9.4@49.784,54.561 49.784,58.42 R56.1 49.911,59.131 50.289,59.509 54.257,59.509 54.535,59.231 54.535,59.135 54.772,58.898 v2(54.772,58.75)
LROUT5: 
LROUT6: 
LROUT7: 
LROUT8: 
LSW_A1: D13.2 K9.6 P10.2 U2.12 | length 53
  Top Layer w0.254: K9.6@59.742,36.703 57.322,36.703 55.499,38.526 55.499,59.234 58.72,62.455 U2.12
  Top Layer w0.5: P10.2 61.925,46.87 59.955,44.9 59.955,40.541 D13.2 K9.6@59.742,36.703 ; K9.6@59.742,36.703 59.817,36.703 K9.6 59.742,36.137 K9.6@59.742,36.703
LSW_A2: U2.13 | length 15.1
  Top Layer w0.254: v2(59.615,49.775) 56.75,52.64 56.75,58.925 58.979,61.154 60.569,61.154 U2.13
LSW_A3: D15.2 K11.6 U2.14 | length 39.2
  Top Layer w0.254: U2.14 60.534,59.849 59.434,59.849 58.2,58.615 58.2,53.857 60.932,51.125 v2(62.125,51.125) ; D15.2@74.4,40.784 v1(74.4,44.9)
  Top Layer w0.5: K11.6@73.767,35.96 73.767,40.151 D15.2 D15.2@74.4,40.784
  Bottom Layer w0.254: v2(62.125,51.125) 72.325,51.125 74.4,49.05 v1(74.4,44.9)
MD1_A: 
MD1_B: 
MD2_A: 
MD2_B: 
MD_DC12V: 
NetBT1_1: 
NetC1_2: C1.2 C2.1 DB1.3 TM1.1 U1.1 | length 50.2
  Top Layer w1: C2.1 C2.1@49.403,86.995
  Top Layer w1.5: TM1.1 26.325,81.075 26.85,81.6 26.85,84.625 27.725,85.5 37.436,85.5 C1.2
  Top Layer w2: C1.2 47.371,84.963 C2.1 49.025,86.865 49.025,95.675 51.495,98.145 DB1.3
NetC16_1: 
NetC17_1: 
NetD1_1: D1.1 R1.1 | length 3
  Top Layer w0.5: R1.1 D1.1
NetD2_1: 
NetD3_1: D3.1 P4.2 Q1.C R38.1 | length 16.9
  Top Layer w1: Q1.C 74.297,109.401 74.304,109.408 74.304,110.71 75.731,112.137 77.811,112.137 80.375,114.701 P4.2 80.375,118.875 79.719,119.531 79.4,119.85 79.4,121.023 D3.1
NetD4_2: D4.2 L1.1 U1.2 | length 51.8
  Top Layer w1: U1.2 29.134,78.41 28.448,77.724 24.257,77.724 23.368,76.835 23.368,66.548 25.146,64.77 42.923,64.77 L1.1 50.857,66.478 D4.2
NetD9_1: 
NetD11_1: 
NetD11_2: 
NetD12_1: 
NetD12_2: 
NetD13_1: D13.1 P10.1 R59.1 | length 15.5
  Top Layer w0.4: D13.1 62.06,40.328 62.06,44.026 62.364,44.33 P10.1
  Top Layer w0.5: D13.1@62.06,40.328 R59.1
NetD13_1_1: 
NetD14_1: 
NetD15_1: D15.1 R61.1 | length 3.7
  Top Layer w0.5: D15.1 R61.1
NetD16_1: 
NetD17_1: 
NetD18_1: 
NetIC1_6: 
NetIC1_7: 
NetJ6_2: J6.2 J6.7 R27.1 | length 33.9
  Top Layer w0.5: R27.1 19.939,17.611 21.625,15.925 27.101,15.925 J6.7
  Top Layer w2: J6.2 J6.7
NetJ6_4: J6.4 J6.8 R42.1 | length 29
  Top Layer w0.5: J6.8 33.425,21.797 33.425,26.475 35.675,28.725 37.775,28.725 41.656,32.606 R42.1
  Top Layer w2: J6.8 J6.4
NetJ6_5: J6.5 R57.1 | length 47
  Top Layer w0.5: J6.5 58.826,22.45 65.675,22.45 67.4,24.175 67.4,26.8 v2(67.5,26.9) ; R57.1 50.522,33.147 v2@50.7,33.325
  Bottom Layer w0.5: v2@50.781,33.15 50.981,32.95 50.989,32.95 52.039,31.9 62.5,31.9 v2(67.5,26.9)
  other v2: 50.75,33.1
NetJ6_6: J6.6 J6.11 R4.1 | length 16.3
  Top Layer w0.5: J6.11 24.473,25.173 27.686,28.386 R4.1
  Top Layer w2: J6.6 J6.11
NetJ6_10: J6.10 K9.2 K9.4 | length 24.4
  Bottom Layer w1.4: J6.10 53.205,18.873 54.025,18.053 54.025,13.175 56.39,10.81 K9.2
NetJ6_12: J6.12 K9.1 K9.3 K11.1 K11.3 R6.1 | length 73.9
  Top Layer w0.5: J6.12 34.925,30.049 R6.1
  Bottom Layer w1.4: J6.12 30.049,26.699 32.225,28.875 54.225,28.875 59.615,23.485 K9.3 K9.1 K11.1@81.7,15.85
NetJ6_13: J6.13
NetJ6_15: J6.15 K11.2 K11.4 | length 58.1
  Top Layer w1.4: J6.15 63.698,25.173 v2(63.9,25.375)
  Bottom Layer w1.4: v2(63.9,25.375) 64.5,24.775 83.53,24.775 84.35,23.955 84.35,13.625 K11.2 K11.4
  other v2: 64.575,25.55
NetJ7_2: 
NetJ7_4: 
NetJ7_5: 
NetJ7_6: 
NetJ7_10: 
NetJ7_12: 
NetJ7_13: 
NetJ7_15: 
NetJP1_7: 
NetJP4_2: 
NetJP4_3: 
NetM1_1: 
NetM1_3: 
NetM1_11: 
NetM1_12: 
NetM1_15: 
NetM1_16: 
NetP2_1: 
NetP3_1: 
NetP5_1: P5.1 R27.2 | length 10.1
  Top Layer w0.5: R27.2 19.939,43.209 P5.1
NetP6_1: P6.1 R4.2 | length 9.8
  Top Layer w0.5: R4.2 27.686,43.806 P6.1
NetP7_1: P7.1 R6.2 | length 8.8
  Top Layer w0.5: R6.2 P7.1@34.925,44.27
NetP8_1: P8.1 R42.2 | length 10
  Top Layer w0.5: R42.2 41.656,44.026 P8.1
NetP9_1: P9.1 R57.2 | length 10.1
  Top Layer w0.5: R57.2 49.149,44.644 P9.1
NetP10_1: 
NetP11_1: 
NetP12_1: 
NetP13_1: 
NetP14_1: 
NetP17_1: 
NetP17_3: 
NetP19_1: 
NetP19_2: 
NetQ1_B: Q1.B R40.2 R43.2 | length 15.6
  Top Layer w0.6: Q1.B 76.554,108.572 76.646,108.572 77.582,109.508 83.508,109.508 R40.2
  Top Layer w1: R40.2@86.875,113.125 R43.2
NetU20_2: 
NetU20_3: 
Q: 
R_CLK: 
R_DIO: 
R_STB: 
R_TER: 
RELAY9: U2.7 U4.IO4 | length 56.2
  Top Layer w0.254: U2.7@69.511,62.455 70.432,62.455 79.687,71.71 110.952,71.71 114.002,68.66 120.531,68.66 U4.IO4
RELAY10: 
RELAY11: 
RESET: 
RIN_B1: 
RIN_B2: 
RIN_B3: 
RIN_B4: 
RIN_B5: 
ROTARY_A: 
ROTARY_A1: P3.4 R67.2 U4.IO15 | length 37.9
  Top Layer w0.254: R67.2 94,43.501 94,47.96 100.165,54.125 107.115,54.125 116.555,63.565 120.516,63.565 U4.IO15
ROTARY_B: 
ROTARY_B1: P3.2 R66.2 U4.IO16 | length 34.9
  Top Layer w0.254: R66.2 96.603,48.427 98.301,50.125 P3.2 105.29,50.125 117.555,62.39 U4.IO16
RST: J7.RST U4.IO9 | length 40.5
  Top Layer w0.254: v1(117.2,31.61) 118.95,31.61 120.55,33.21 120.55,47.01 122.125,48.585 v1(122.125,48.735) ; U4.IO9 124.975,54.708 v1(124.975,51.36)
  Bottom Layer w0.254: J7.RST@110.925,21.485 J7.RST 111.95,22.645 111.95,26.175 117.2,31.425 v1(117.2,31.61) ; v1(122.125,48.735) 124.75,51.36 v1(124.975,51.36)
RSW_A1: 
RSW_A2: 
RSW_A3: 
RXD0: P12.5 U4.RXD0 | length 20.9
  Top Layer w0.254: U4.RXD0 138.098,67.41 v1(140.925,67.41)
  Bottom Layer w0.254: P12.5 134.065,80.499 134.415,80.149 134.415,80.095 142.125,72.385 142.125,68.66 140.925,67.46 v1(140.925,67.41)
SCL: J7.SCL U4.IO12 | length 43.6
  Top Layer w0.254: v1(124.65,46.435) 128.739,50.524 U4.IO12
  Bottom Layer w0.254: J7.SCL 100.63,24.362 100.952,24.685 100.952,24.794 105.334,29.176 122.593,46.435 v1(124.65,46.435)
SDA: J7.SDA U4.IO13 | length 47.2
  Top Layer w0.254: v1(124.425,44.335) 129.992,49.902 U4.IO13
  Bottom Layer w0.254: J7.SDA 101.925,22.78 101.925,24.785 121.475,44.335 v1(124.425,44.335)
SPI_MISO: 
SPI_MOSI: 
SPI_SCK: 
TXD0: P12.4 U4.TXD0 | length 19.3
  Top Layer w0.254: U4.TXD0 138.133,68.835 v1(139.95,68.835)
  Bottom Layer w0.254: P12.4 131.525,81.173 132.208,80.49 132.395,80.49 141.15,71.735 141.15,70.035 v1(139.95,68.835)
VCC: C3.1 C10.1 C13.2 L1.2 R1.2 R3.2 R5.2 R36.2 R41.2 R56.2 R62.1 R63.1 R64.1 R65.1 U1.4 U3.VCC U5.3 | length 201.7
  Top Layer w1: R5.2 24.257,57.718 v2(25.15,56.825) ; R3.2 31.242,57.858 v2(32.325,56.775) ; 32.028,76.378 32.538,76.888 U1.4 ; R36.2 38.227,57.898 v2(39.325,56.8) ; R41.2 45.212,57.913 v2@46.275,56.85 ; R56.2 52.197,58.078 v2(53.325,56.95) ; v1(74.35,52.675) 74.807,53.132 U3.VCC@77.009,53.132 ; U3.VCC U3.VCC@77.009,53.132 ; R62.1 81.746,46.8 80.26,48.286 80.26,48.54 C13.2 80.016,48.784 78.716,48.784 77.009,50.491 U3.VCC@77.009,53.132 ; R62.1@83.375,46.842 R65.1
  Top Layer w1.4: C10.1 70.349,101.725 78.777,101.725 79.655,100.846 U5.3@79.655,99.3
  Top Layer w2: R1.2 28.139,67.564 30.226,69.651 C3.1 30.226,74.576 32.028,76.378 L1.2
  Bottom Layer w1.2: v2(53.325,56.95) 57.6,52.675 v1(74.35,52.675) v1@74.5,52.675
  Bottom Layer w1.5: v2(25.15,56.825) 30.226,61.901 C3.1 30.226,76.551 32.975,79.3 53.25,79.3 59.85,85.9 59.85,91.226 C10.1
  Bottom Layer w2: v2(25.15,56.825) 53.325,56.825 v2@53.34,56.825
  other v2: 46.325,56.65
W_DC24V: 
W_GND: 
WAIT: J7.WAT U4.IO11 | length 43.7
  Top Layer w0.254: v1(123.175,42.385) 123.175,46.76 v1(127.414,50.999) 127.452,51.037 U4.IO11
  Bottom Layer w0.254: J7.WAT 104.45,22.765 104.45,24.288 122.547,42.385 v1(123.175,42.385)
WR: J7.WR U4.IO46 | length 37.8
  Top Layer w0.254: J7.WR 114.6,22.755 114.6,24.885 121.775,32.06 121.775,46.635 123.659,48.519 U4.IO46
  Bottom Layer w0.254: J7.WR J7.WR@113.6,21.485
X_ASTB: 
X_BSTB: 
X_CLK: 
X_CSTB: 
X_DIO: 
X_DSTB: 
X_ESTB: 
X_FSTB: 
X_GSTB: 
X_SW_1: 
X_SW_2: 
X_SW_3: 
X_SW_4: 
pads on no net: "U3.QH\"" J3.3 J4.2 J7.NC J7.T_IN P3.1 U1. U2.1 U2.2 U2.3 U2.4 U2.5 U2.6 U2.8 U2.11 U2.15 U2.16 U2.17 U2.18 U3.D3 U4.IO19 U4.IO20

## Polygon pours and split planes (outlines as drawn)
GND on Bottom Layer "NONET_L-01_P-001" (solid, pour order 0): 117,110.725 148.65,110.725 148.65,20.4 146.275,18.025 120.025,18.025 116.725,14.725 97.75,14.725 92.875,19.6 92.875,36.75 95.525,36.75 105.8,47.025 105.8,104.775
GND on Top Layer "NONET_L-01_P-001" (solid, pour order 1): 116.95,110.725 148.85,110.725 148.975,110.6 148.975,20.35 146.475,17.85 119.775,17.85 116.7,14.775 97.325,14.775 97.325,15.125 92.9,19.55 92.9,36.25 95.118,36.25 105.825,46.957 105.825,104.8

## Keep-outs
Keep-Out Layer:
  circle w0.254: c10,10 r2.5
  circle w0.254: c10,118 r2.5
  circle w0.254: c125,10 r2.5
  circle w0.254: c125,118 r2.5
  lines w0.254: 0,0 151.5,0 151.5,128 0,128 0,0

## Silkscreen, mask and mechanical layers (free items; w line width, h text height)
Top Overlay:
  circle w0.254: c10,10 r4.5
  circle w0.254: c10,118 r4.5
  circle w0.254: c125,10 r4.5
  circle w0.254: c125,118 r4.5
  text "-" at 105.09,124.187 h2
  text "+" at 108.942,124.038 h2
  text "按钮" at 92.575,75.452 h2
  text "旋钮" at 100.571,58.445 h2
  text "-" at 74.004,46.204 h1
  text "+" at 74.004,43.712 h1
  text "ver2.2.0轩23/6/13" at 131.625,2.75 h2

## Text inside footprints (layer, text, board x,y; h text height)
J7: Top Overlay "2" at 91.74,21.866 h1 r180; Top Overlay "1" at 91.867,24.787 h1 r180; Top Overlay "33" at 144.572,24.406 h1 r180; Top Overlay "34" at 144.191,21.739 h1 r180